# Altium PCB MP_MB_2015-01-222_B-2.PcbDoc
Units mil, origin at the board's own origin, x right, y up, seen from the top; angles counter-clockwise.
Board outline 1377.95 x 2244.1 mil, 2 copper layers (Top Layer, Bottom Layer), stack 42.17 mil thick; 41 components, 25 nets, 152 pads, 27 vias.
Unrouted connection lines stored in the file: 1.
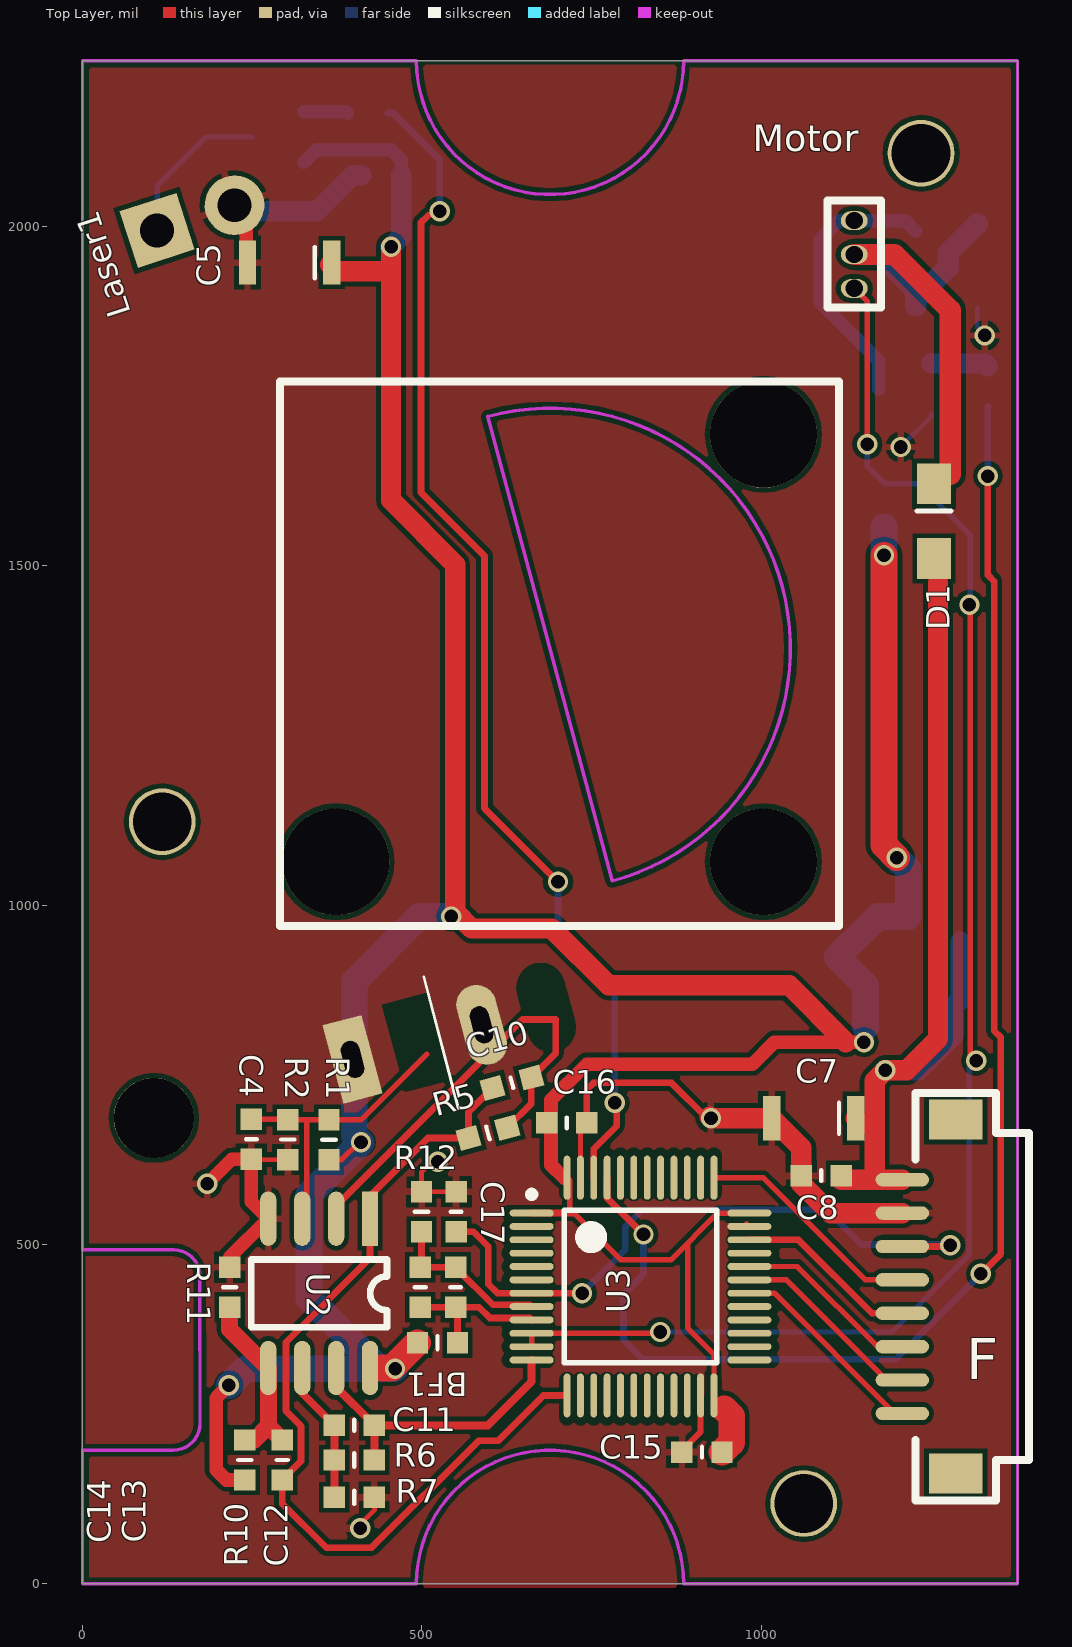
[diagram p0: Top Layer view]
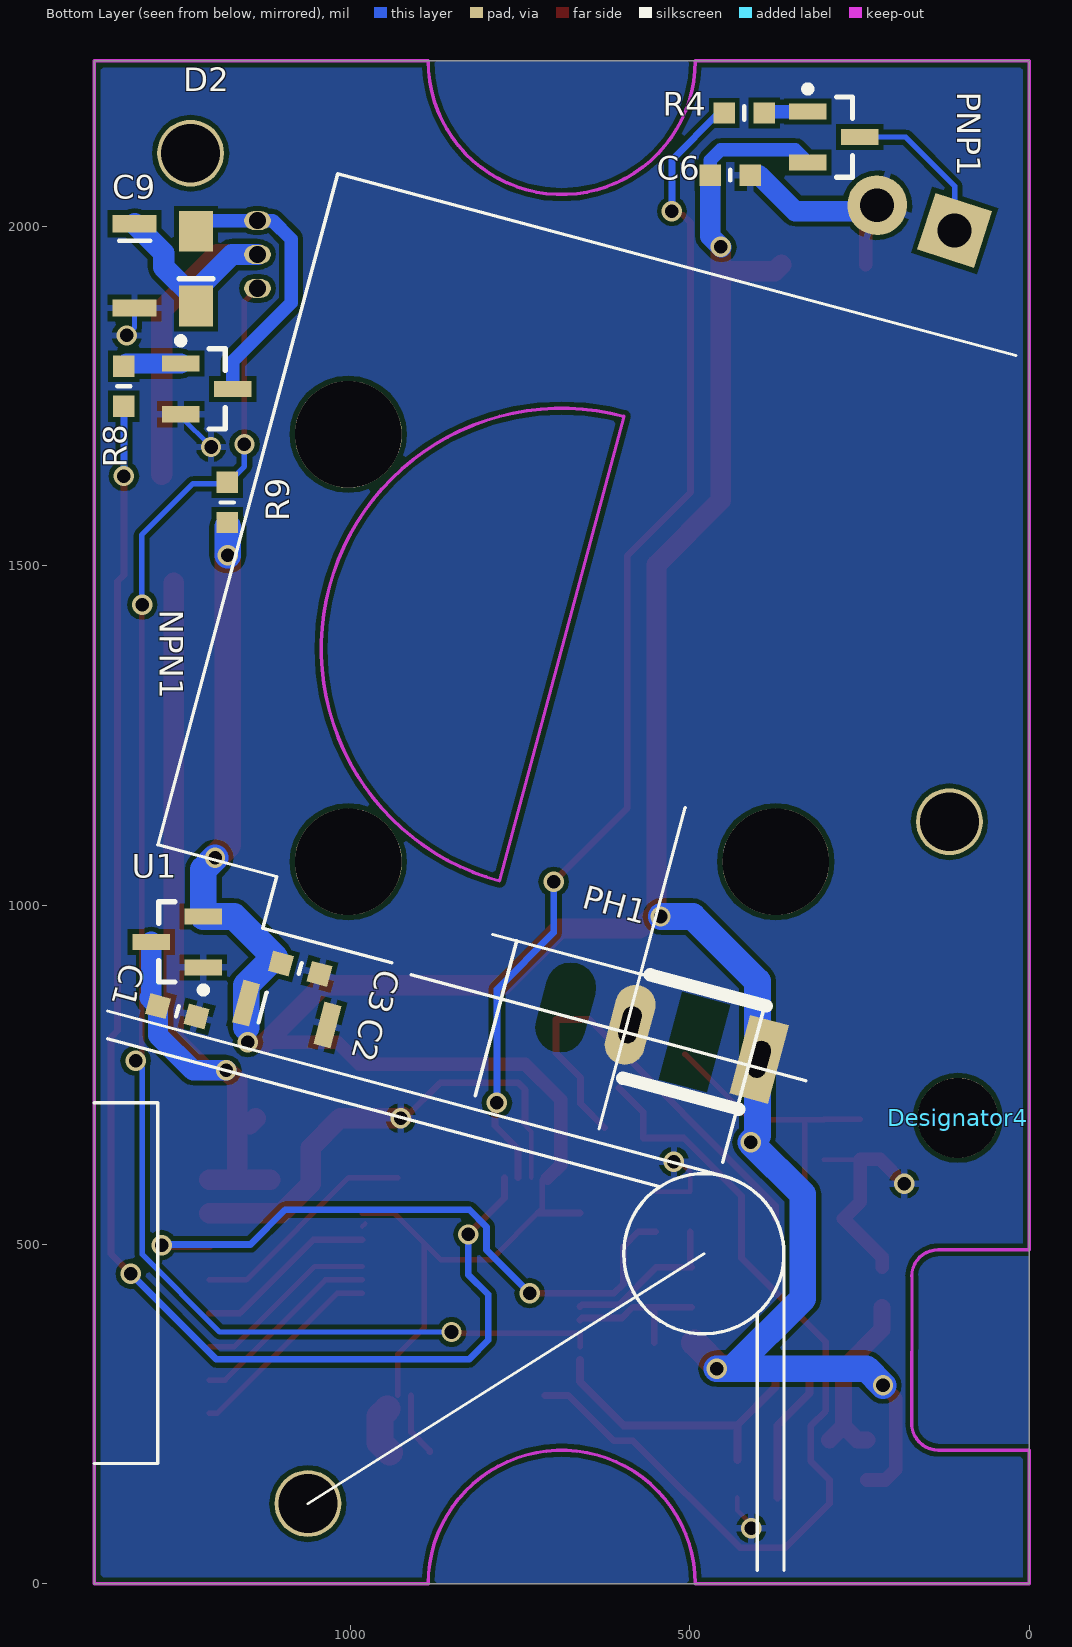
[diagram p1: Bottom Layer view, seen from below]

## Layer stack, top to bottom
Top Layer: signal copper 1.4
Dielectric: core 39.3701, FR-4, Dk 4.8
Bottom Layer: signal copper 1.4

## Board outline
1377.95,2244.1 1377.95,0 0,0 0,2244.1

## Design rules (kind name [scope] priority, off if disabled: settings)
Clearance [All] p1: gap=7
MinimumSolderMaskSliver [All] p1: minsoldermaskwidth=1
PolygonConnect [All] p1: connectstyle=Relief reliefconductorwidth=10 reliefentries=4 polygonreliefangle="90 Angle" airgapwidth=10
RoutingVias [All] p1: holewidth=28 width=50 viastyle="Through Hole" minholewidth=28 minwidth=50 maxholewidth=28 maxwidth=50
SilkToSilkClearance [All] p1: silktosilkclearance=0
SilkToSolderMaskClearance SilkscreenOverComponentPads [IsPad] p1: minsilkscreentomaskgap=0 clearancetoexposedcopper=TRUE
SolderMaskExpansion [All] p1: expansion=4
Width [All] p1: maxlimit=157.48 minlimit=7 preferedwidth=10
25 further rules are at their usual default settings.

## Components (designator, comment, footprint, x,y, rotation, side; value= is the part's Value field where it differs from the comment)
BF1 "BF" R0603 523.13,355.33 r180 top
C1 "1uf" C0603 1255.42,843.52 r195 bottom
C2 "10uf" PolarC1206 1094,839.58 r195 bottom
C3 "1uf" C0603 1074.32,906.51 r195 bottom
C4 "1uf" C0603 248.83,655 r270 top
C5 "10uf" PolarC1206 305.12,1946.85 r180 top
C6 "1uf" C0603 440.46,2075.8 r180 bottom
C7 "10uf" PolarC1206 1077.76,686.02 r180 top
C8 "1uf" C0603 1088.58,601.38 r180 top
C9 "10uf" PolarC1206 1318.41,1941.94 r270 bottom
C10 "6.8pF" C0603 632.87,738.19 r15 top
C11 "240pF" C0603 400.65,233.59 r180 top
C12 "0.15uf" C0603 294.35,182.41 r270 top
C13 "1uf" C0603 549.83,437 r270 top
C14 "0.1uf" C0603 497.83,437 r270 top
C15 "1uf" C0603 912.9,193.91 r0 top
C16 "1uf" C0603 713.58,679.13 r180 top
C17 "1uf" C0603 550.69,548.24 r90 top
D1 "1N5817" Diode1206 1254.92,1565.94 r90 top
D2 "1N5817" Diode1206 1227.86,1938 r270 bottom
Designator4 "Comment" 4.2mm -222.93,687.02 r180 bottom
F "Header 8" S-SIN-8 1208.17,595.48 r0 top
Laser1 "Laser" Laser 94,1989.19 r18 top
Motor "Header 3" SIP3-1mm 1137.31,2008.87 r270 top
NPN1 "8050" SOT23-3 1212.11,1760.84 r180 bottom
PH1 "photodetector" BPW34 493.11,798.23 r15 bottom
PNP1 "8550" SOT23-3 287.9,2131.9 r180 bottom
R1 "4K7" R0603 363.21,654.47 r270 top
R2 "1K" R0603 302.66,654.54 r90 top
R4 "1K" R0603 419.79,2167.33 r0 bottom
R5 "10M" R0603 597.44,664.37 r195 top
R6 "220K" R0603 400.65,182.41 r0 top
R7 "3K" R0603 400.65,127.29 r180 top
R8 "1K" R0603 1334.16,1764.78 r270 bottom
R9 "10K" R0603 1182.09,1593.5 r270 bottom
R10 "2M" R0603 239.23,182.41 r270 top
R11 "510" R0603 216.83,437 r270 top
R12 "0" R0603 499.51,548.24 r270 top
U1 "XC62FP3302MR" SOT23-3 1255.42,945.88 r0 bottom
U2 "LMC6482" SOP-8 423.83,538 r270 top
U3 "STM32F103C8T6" QFP-48 822.35,438 r0 top

## Footprints (in the part's own frame and the unit in brackets; to place one, negate y for a bottom-side part, rotate by r counter-clockwise, add the part's x,y. Pads: shape width x height; smd on the part's side, far side on the other; paste and mask are expansions set on the pad)
4.2mm [mm]
  round 3 hole 3: 0(-8.336,-0.013)
BPW34 [mm]
  rect 1.5x3.048 hole 0.7 slot 1.4 at 90.5 deg: A(-2.5,0)
  oval 1.5x3.048 hole 0.7 slot 1.4 at 90.5 deg: C(2.5,0)
  silkscreen extent -2.25,-2 2.25,2
C0603 [mm]
  rect 0.8x0.8 smd: 1(-0.75,0) 2(0.75,0)
  silkscreen extent 0,-0.2 0,0.2, body extent -0.8,-0.4 0.8,0.4, height 0.8
Diode1206 [mil]
  rect 60x50 smd: A(-55,0) C(55,0)
  silkscreen extent 15,-25 15,25, body extent -63,-31 63,31, height 63
Laser [mil]
  rect 88x88 hole 50: 1(16.77,0)
  round 88 hole 50: 2(136.77,0)
PolarC1206 [mm]
  rect 0.65x1.65 smd: A(-1.575,0) C(1.575,0)
  silkscreen extent -0.94,-0.58 -0.94,0.58, body extent -1.6,-0.8 1.6,0.8, height 0.6
QFP-48 [mil] "TSQFP, 48-Leads, Body 9.0x9.0mm (max), Pitch 0.50mm, IPC Medium Density"
  oval 65x10 smd: 1(-160.43,108.27) 2(-160.43,88.58) 3(-160.43,68.9) 4(-160.43,49.21) 5(-160.43,29.53) 6(-160.43,9.84) 7(-160.43,-9.84) 8(-160.43,-29.53) 9(-160.43,-49.21) 10(-160.43,-68.9) 11(-160.43,-88.58) 12(-160.43,-108.27) 25(160.43,-108.27) 26(160.43,-88.58) 27(160.43,-68.9) 28(160.43,-49.21) 29(160.43,-29.53) 30(160.43,-9.84) 31(160.43,9.84) 32(160.43,29.53) 33(160.43,49.21) 34(160.43,68.9) 35(160.43,88.58) 36(160.43,108.27)
  oval 10x65 smd: 13(-108.27,-160.43) 14(-88.58,-160.43) 15(-68.9,-160.43) 16(-49.21,-160.43) 17(-29.53,-160.43) 18(-9.84,-160.43) 19(9.84,-160.43) 20(29.53,-160.43) 21(49.21,-160.43) 22(68.9,-160.43) 23(88.58,-160.43) 24(108.27,-160.43) 37(108.27,160.43) 38(88.58,160.43) 39(68.9,160.43) 40(49.21,160.43) 41(29.53,160.43) 42(9.84,160.43) 43(-9.84,160.43) 44(-29.53,160.43) 45(-49.21,160.43) 46(-68.9,160.43) 47(-88.58,160.43) 48(-108.27,160.43)
  silkscreen extent -165,-112 112,141, body extent -187,-187 187,187, height 59
R0603 [mm]
  rect 0.8x0.8 smd: 1(-0.75,0) 2(0.75,0)
  silkscreen extent 0,-0.25 0,0.25, body extent -0.8,-0.4 0.8,0.4, height 0.5
S-SIN-8 [mm]
  rect 2x1.5 smd: 0(2,-11) 0(2,2.25)
  oval 2x0.5 smd: 1(0,0) 2(0,-1.25) 3(0,-2.5) 4(0,-3.75) 5(0,-5) 6(0,-6.25) 7(0,-7.5) 8(0,-8.75)
  silkscreen extent 0.5,-12 4.75,3.25
SIP3-1mm [mm]
  oval 0.7x1 hole 0.65: 1(0,0) 2(1.27,0) 3(2.54,0)
  silkscreen extent -0.75,-1 3.25,1
SOP-8 [mil]
  rect 80x24 smd: 1(0,0)
  oval 80x24 smd: 2(0,-50) 3(0,-100) 4(0,-150) 5(220,-150) 6(220,-100) 7(220,-50) 8(220,0)
  silkscreen extent 60,-175 160,25
SOT23-3 [mm]
  rect 1.4x0.6 smd: 1(-0.975,0.95) 2(-0.975,-0.95) 3(0.975,0)
  silkscreen extent -1.1,-1.5 0.7,1.92, body extent -0.7,-1.5 0.7,1.5, height 1

## Part data
BF1: "磁?"
C1 C3 C4 C6 C8 C10 C11 C12 C13 C14 C15 C16 C17: library part C
C2 C5 C7 C9: library part PolarCap
D1 D2: library part Diode
F: "Header, 8-Pin"
Motor: "Header, 3-Pin"
NPN1: library part NPN
PH1: library part PH
PNP1: library part PNP
R1 R2 R4 R5 R6 R7 R8 R9 R10 R11 R12: library part R
U2: library part AD8629

## Free pads (board coordinates)
  round 236.22 on Bottom Solder: 0(479.83,485.25)
  round 157.48 hole 157.48: 0(1003.45,1693.91) 1(1003.45,1063.99) 2(373.53,1063.99)
  round 98.43 hole 86.61: 0(1235.83,2108) 1(117.62,1123.04) 2(1062.99,118.11)

## Via types
v1: diameter 30, hole 20, Top Layer to Bottom Layer, 27 vias

## Nets (pads, with @x,y where several pads share a name; then routed paths per layer and width w, separated by ;. In a path a pad name is that pad's centre, name@x,y a point inside that pad or via, vN(x,y) a via of type N, cw(c..) or ccw(c..) an arc to the next point about the centre after c; other vN are vias at no path point)
+5V: C1.1 C7.A C8.1 D1.A F.1 U1.3 | length 1325.2
  Top Layer w30: C8.1@1118.11,595.48 1167.32,595.48 ; C7.A 1148.62,677.17 1167.32,677.17 ; F.1 1167.32,595.48 ; 1260.83,1475.03 1260.83,803.15 1214.57,756.89 v1(1183.07,756.89) 1167.32,741.14 1167.32,677.17 ; 1167.32,595.48 1167.32,677.17
  Bottom Layer w30: v1(1183.07,756.89) 1232.28,756.89 1283.94,808.55 C1.1 C1.1@1293.8,861.02 ; U1.3 C1.1@1293.8,861.02 ; C1.1@1296.26,863.48 C1.1@1293.8,861.02
AGND: C13.1 C14.1 R12.2 U3.8 | length 241.3
  Top Layer w10: R12.2 499.51,468.21 C14.1 C13.1 549.83,466.01 604.67,411.16 659.23,411.16 U3.8
C_LASER: R4.2 U3.46 | length 1727.8
  Top Layer w10: 509.84,2016.73 499.02,2005.91 499.02,1608.27 592.52,1514.76 592.52,1142.72 v1(700.79,1034.45) ; U3.46 753.45,641.01 787.4,674.96 v1@787.4,699.8
  Bottom Layer w10: R4.2 457.67,2167.33 526.57,2098.43 v1(526.57,2022.64) ; v1(700.79,1034.45) 700.79,959.65 784.45,875.98 v1(784.45,708.66)
C_MOTOR: R8.2 U3.45 | length 2169.2
  Top Layer w10: U3.45 773.13,568.4 v1(826.77,514.76) ; v1(1323.82,456.69) 1353.35,486.22 1353.35,805.12 1343.5,814.96 1343.5,1477.36 1334.16,1486.71 v1(1334.16,1632.38)
  Bottom Layer w10: v1(826.77,514.76) 826.77,455.71 797.24,426.18 797.24,359.25 825.79,330.71 1197.83,330.71 v1(1323.82,456.69) ; R8.2 v1(1334.16,1632.38) v1@1338.58,1627.95
GND: C1.2 C2.C C3.2 C4.2 C5.C C6.2 C7.C C8.2 C9.C C15.1 C16.1 C17.2 F.2 Laser1.2 NPN1.2 R2.1 R7.1 R11.1 R12.1 U1.1 U2.4 U3.23 U3.35 U3.47 | length 1720.5
  Top Layer w7: C4.2 249.28,625.01 R2.1 ; v1(409.45,81.69) 409.45,87.6 430.17,108.32 R7.1 ; v1@514.76,622.05 499.51,606.79 R12.1 C17.2 ; U3.47 733.76,666.35 C16.1@749.51,682.1 ; U3.35@978.59,530.77 U3.35
  Top Layer w9: C15.1 883.37,196.36 910.93,223.92 U3.23
  Top Layer w10: C16.1 743.11,728.35 752.95,738.19 868.11,738.19 920.28,686.02 v1(926.18,686.02)
  Top Layer w20: v1(184.06,589.57) 219.96,625.47 C4.2 248.83,563 U2.4 216.83,481 R11.1 ; Laser1.2 241.14,2014.39 C5.C@241.14,1943.9
  Top Layer w30: v1@924.21,687.99 v1(926.18,686.02) C7.C 1059.05,642.72 C8.2 1059.05,589.57 1102.35,546.27 F.2
  Bottom Layer w7: v1(1205.71,1675.2) 1250.5,1719.98 NPN1.2 ; C9.C 1318.41,1850.88 v1(1329.72,1839.57)
  Bottom Layer w30: Laser1.2@224.41,2022.64 344.97,2022.64 398.13,2075.8 C6.2
  other v1: 523.62,622.05
M_SIG: Motor.3 R9.1 U3.10 U3.11 | length 2220.1
  Top Layer w8: U3.11 U3.10 v1@852.35,369.11 ; Motor.3 1156.5,1889.68 v1(1156.5,1679.13) ; v1@1308.07,778.54 v1@1308.07,1442.91
  Bottom Layer w8: v1(851.38,371.06) 1192.91,371.06 1307.09,485.24 v1@1307.09,759.84 ; v1(1156.5,1679.13) 1156.5,1646.67 R9.1@1182.09,1621.08 ; R9.1 R9.1@1182.09,1621.08 ; v1@1308.07,1442.91 1308.07,1545.28 1232.27,1621.08 R9.1@1182.09,1621.08
  other v1: 1316.93,770.67 1307.09,1442.91
NetC9_A: C9.A D1.C D2.C Motor.2 | length 701.2
  Top Layer w31.5: Motor.2 1196.64,1958.87 1278.54,1876.97 D1.C@1278.54,1635.23
  Bottom Layer w31.5: Motor.2 1174.82,1958.87 1227.86,1905.83 D2.C@1227.86,1892.51 ; D2.C D2.C@1227.86,1892.51 ; C9.A 1275.61,1961.15 1275.61,1940.25 D2.C@1227.86,1892.51
NetC10_2: C10.2 PH1.C R5.1 U2.2 | length 645.5
  Top Layer w10: U2.2 373.83,556.97 648.33,831.47 697.53,831.47 697.53,781.96 C10.2 661.4,707.45 R5.1
NetC11_2: C11.2 R6.1 R7.2 U2.6 | length 210.3
  Top Layer w11.81: U2.6 323.83,280.88 C11.2 R6.1 R7.2
NetC12_1: C12.1 R10.1 R11.2 U2.5 | length 270.7
  Top Layer w25: R11.2 216.83,375 U2.5 273.83,232.45 ; R10.1 253.31,211.93 273.83,232.45 ; C12.1 273.83,232.45
NetD2_A: D2.A Motor.1 NPN1.3 | length 414.4
  Bottom Layer w20: NPN1.3 1173.72,1801.67 1087.6,1887.8 1087.6,1981.3 1115.17,2008.87 Motor.1 1211.99,2008.87 D2.A
NetLaser1_1: Laser1.1 PNP1.3 | length 234.8
  Bottom Layer w7.87: Laser1.1 109.95,2059.75 182.1,2131.9 PNP1.3
NetNPN1_1: NPN1.1 R8.1 | length 85.3
  Bottom Layer w30: NPN1.1 1330.22,1798.24 R8.1
NetPNP1_1: PNP1.1 R4.1 | length 64.8
  Bottom Layer w20: PNP1.1 388.29,2169.3 R4.1
OUT1: C10.1 C12.2 R5.2 U2.1 U3.13 | length 1334
  Top Layer w10: C10.1 568.92,695.11 R5.2 509.09,656.73 423.83,571.46 U2.1 423.83,479.94 299.83,355.94 299.83,254.92 322.1,232.65 322.1,180.63 C12.2 294.35,118.05 359.25,53.15 426.18,53.15 583.66,210.63 612.2,210.63 679.15,277.57 U3.13
OUT2: C11.1 R6.2 U2.7 U3.12 | length 449.2
  Top Layer w11.81: U2.7 373.83,289.93 C11.1 ; R6.2 C11.1 ; U3.12 661.91,297.74 597.76,233.59 C11.1
RESET: C17.1 F.3 U3.7 | length 963.7
  Top Layer w10: C17.1 576.28,518.71 597.94,497.06 597.94,441.94 611.72,428.16 U3.7 v1(736.21,428.16) v1@737.2,427.17 ; F.3 1267.73,497.06 1270.67,500 1271.65,499.02 v1(1278.54,499.02)
  Bottom Layer w10: v1(736.21,428.16) 799.77,491.73 799.77,525.95 825.01,551.18 1096.46,551.18 1147.64,500 1277.56,500 v1(1278.54,499.02)
RXD: F.7 U3.31 | length 286.5
  Top Layer w8: U3.31 1037.39,447.85 1185.03,300.21 F.7
SCLK: F.4 U3.37 | length 339.9
  Top Layer w8: U3.37 1002.94,598.44 1153.53,447.85 F.4
SDAT: F.5 U3.34 | length 270.2
  Top Layer w10: U3.34 1055.11,506.9 1163.37,398.63 F.5
SET: F.6 U3.32 | length 274.3
  Top Layer w8: U3.32 1053.14,467.53 1171.25,349.42 F.6
TXD: F.8 U3.30 | length 298.8
  Top Layer w8: U3.30 1019.67,428.16 1196.84,251 F.8
V0.58: C4.1 PH1.A R1.1 R2.2 U2.3 | length 447.7
  Top Layer w8: C4.1 302.21,684.52 R2.2 330.71,684.07 ; U2.3 330.71,544.88 330.71,684.07 ; 507.39,780.52 410.86,684 R1.1 363.14,684.07 330.71,684.07
VCC3.3: BF1.2 C2.A C3.1 C5.A C6.1 C15.2 C16.2 PNP1.2 R1.2 R9.2 R10.2 U1.2 U2.8 U3.1 U3.24 U3.36 U3.48 | length 5661.6
  Top Layer w8: R1.2 381.83,624.94 407.48,650.59 v1(410.43,650.59) ; U3.48 717.76,594.75 717.76,552.9 793.31,477.36 867.13,477.36 936.04,546.27 U3.36 ; 891.73,501.97 891.73,376.97 930.61,338.09 U3.24
  Top Layer w10: U3.1 724.2,546.27
  Top Layer w20: v1(215.55,292.32) 196.85,273.62 196.85,168.31 212.28,152.88 R10.2 ; U3.48@710.12,597.48 690.46,617.14 690.46,713.09 743.11,765.75 987.2,765.75 1019.69,798.23 1125,798.23 v1(1151.57,798.23)
  Top Layer w30: C5.A@365.16,1943.9 375,1934.06 454.72,1934.06 ; v1(454.72,1970.47) 454.72,1934.06 ; 1125,798.23 1041.34,881.89 775.59,881.89 691.93,965.55 573.82,965.55 549.21,990.16 549.21,1501.97 454.72,1596.46 454.72,1934.06
  Top Layer w39.37: 441.93,318 456.28,318 BF1.2 ; C15.2 956.69,208.18 956.69,247.05 945.87,257.87 ; v1(1181.1,1515.75) 1181.1,1088.58 v1(1199.8,1069.88)
  Bottom Layer w20: PNP1.2 344.97,2113.19 454.72,2113.19 469.98,2097.93 C6.1
  Bottom Layer w30: v1@453.75,1969.5 v1(454.72,1970.47) 469.98,1985.73 C6.1
  Bottom Layer w39.37: v1(215.55,292.32) 240.16,316.93 437.01,316.93 ; v1(460.63,316.93) 437.01,316.93 ; v1@542.32,983.27 496.06,983.27 400.59,887.8 400.59,660.43 v1(410.43,650.59) 333.66,573.82 333.66,420.28 437.01,316.93 ; 1153.9,820.23 C2.A 1153.9,881.54 1112.06,923.37 1171.97,983.28 U1.2 1217.03,1052.65 v1(1199.8,1069.88) ; v1(1181.1,1515.75) R9.2@1181.1,1557.59
  other v1: 543.31,983.27
VDDA: BF1.1 C13.2 C14.2 U3.9 | length 225.1
  Top Layer w10: C14.2 C13.2 ; BF1.1 552.66,404.63 C13.2 ; U3.9 659.23,391.48 600.32,391.48 584.33,407.47 C13.2
pads on no net: Designator4.0 F.0 U3.2 U3.3 U3.4 U3.5 U3.6 U3.14 U3.15 U3.16 U3.17 U3.18 U3.19 U3.20 U3.21 U3.22 U3.25 U3.26 U3.27 U3.28 U3.29 U3.33 U3.38 U3.39 U3.40 U3.41 U3.42 U3.43 U3.44

## Polygon pours and split planes (outlines as drawn)
GND on Bottom Layer "Bottom Layer-No Net" (solid, pour order 10): 0.72,2244.77 0.72,0.67 1378.67,0.67 1378.67,2244.77
GND on Top Layer "Bottom Layer-No Net" (solid, pour order 12): 5.02,2238.57 5.02,-5.53 1382.97,-5.53 1382.97,2238.57

## Keep-outs
Keep-Out Layer:
  lines w5: 133.37,196.85 0,196.85 0,0 492.13,0 cw(c688.98,0) 885.83,0 1377.95,0 1377.95,2244.1 885.83,2244.1 cw(c688.98,2244.1) 492.13,2244.1 0,2244.1 0,492.13 134.27,492.13 cw(c134.27,453.17) 173.23,453.17 ; 133.86,196.85 ccw(c133.86,236.22) 173.23,236.22 ; 172.74,453.75 173.23,232.28 ; 597.27,1720.21 cw(c688.98,1377.95) 780.68,1035.7 597.27,1720.21

## Silkscreen, mask and mechanical layers (free items; w line width, h text height)
Top Overlay:
  lines w3.94: 502.95,894.69 554.13,699.8
  lines w11.81: 290.83,969.5 290.83,1771.98 1114.83,1771.98 1114.83,969.5 290.83,969.5
Bottom Overlay:
  circle w5: c479.55,486.28 r118.11
  lines w3.94: 479.33,486.22 1062.99,118.11
  lines w5: 19.68,1810 1019.09,2077.79 1284.03,1089.05 1109.1,1042.18 1129.47,966.12 939.33,915.17 ; 329.12,741.48 910.75,897.32 ; 361.44,19.69 361.44,486.28 cw(c479.55,486.28) 448.98,600.37 1358.27,844.01 ; 400.81,19.68 400.81,398.25 ; 451.49,621.42 390.36,849.59 790.67,956.85 ; 507.18,1143.73 634.03,670.33 ; 544.21,585.12 1358.27,803.25 ; 755.43,947.41 816.57,719.24 ; 1377.95,177.17 1284.03,177.17 1284.03,708.66 1377.95,708.66
Mechanical 1:
  circle w5: c1003.94,1692.91 r82.68
  circle w5: c1240.16,2106.3 r43.31
  circle w5: c118.11,1122.05 r43.31
  circle w5: c1062.99,118.11 r43.31
  circle w5: c1003.94,1062.99 r82.68
  circle w5: c374.02,1062.99 r82.68